# Altium PCB science_board_pcb.PcbDoc
Units mil, origin at the board's own origin, x right, y up, seen from the top; angles counter-clockwise.
Board outline 3965 x 3149.61 mil, 2 copper layers (Top Layer, GND); 127 components, 64 nets, 371 pads, 90 vias.
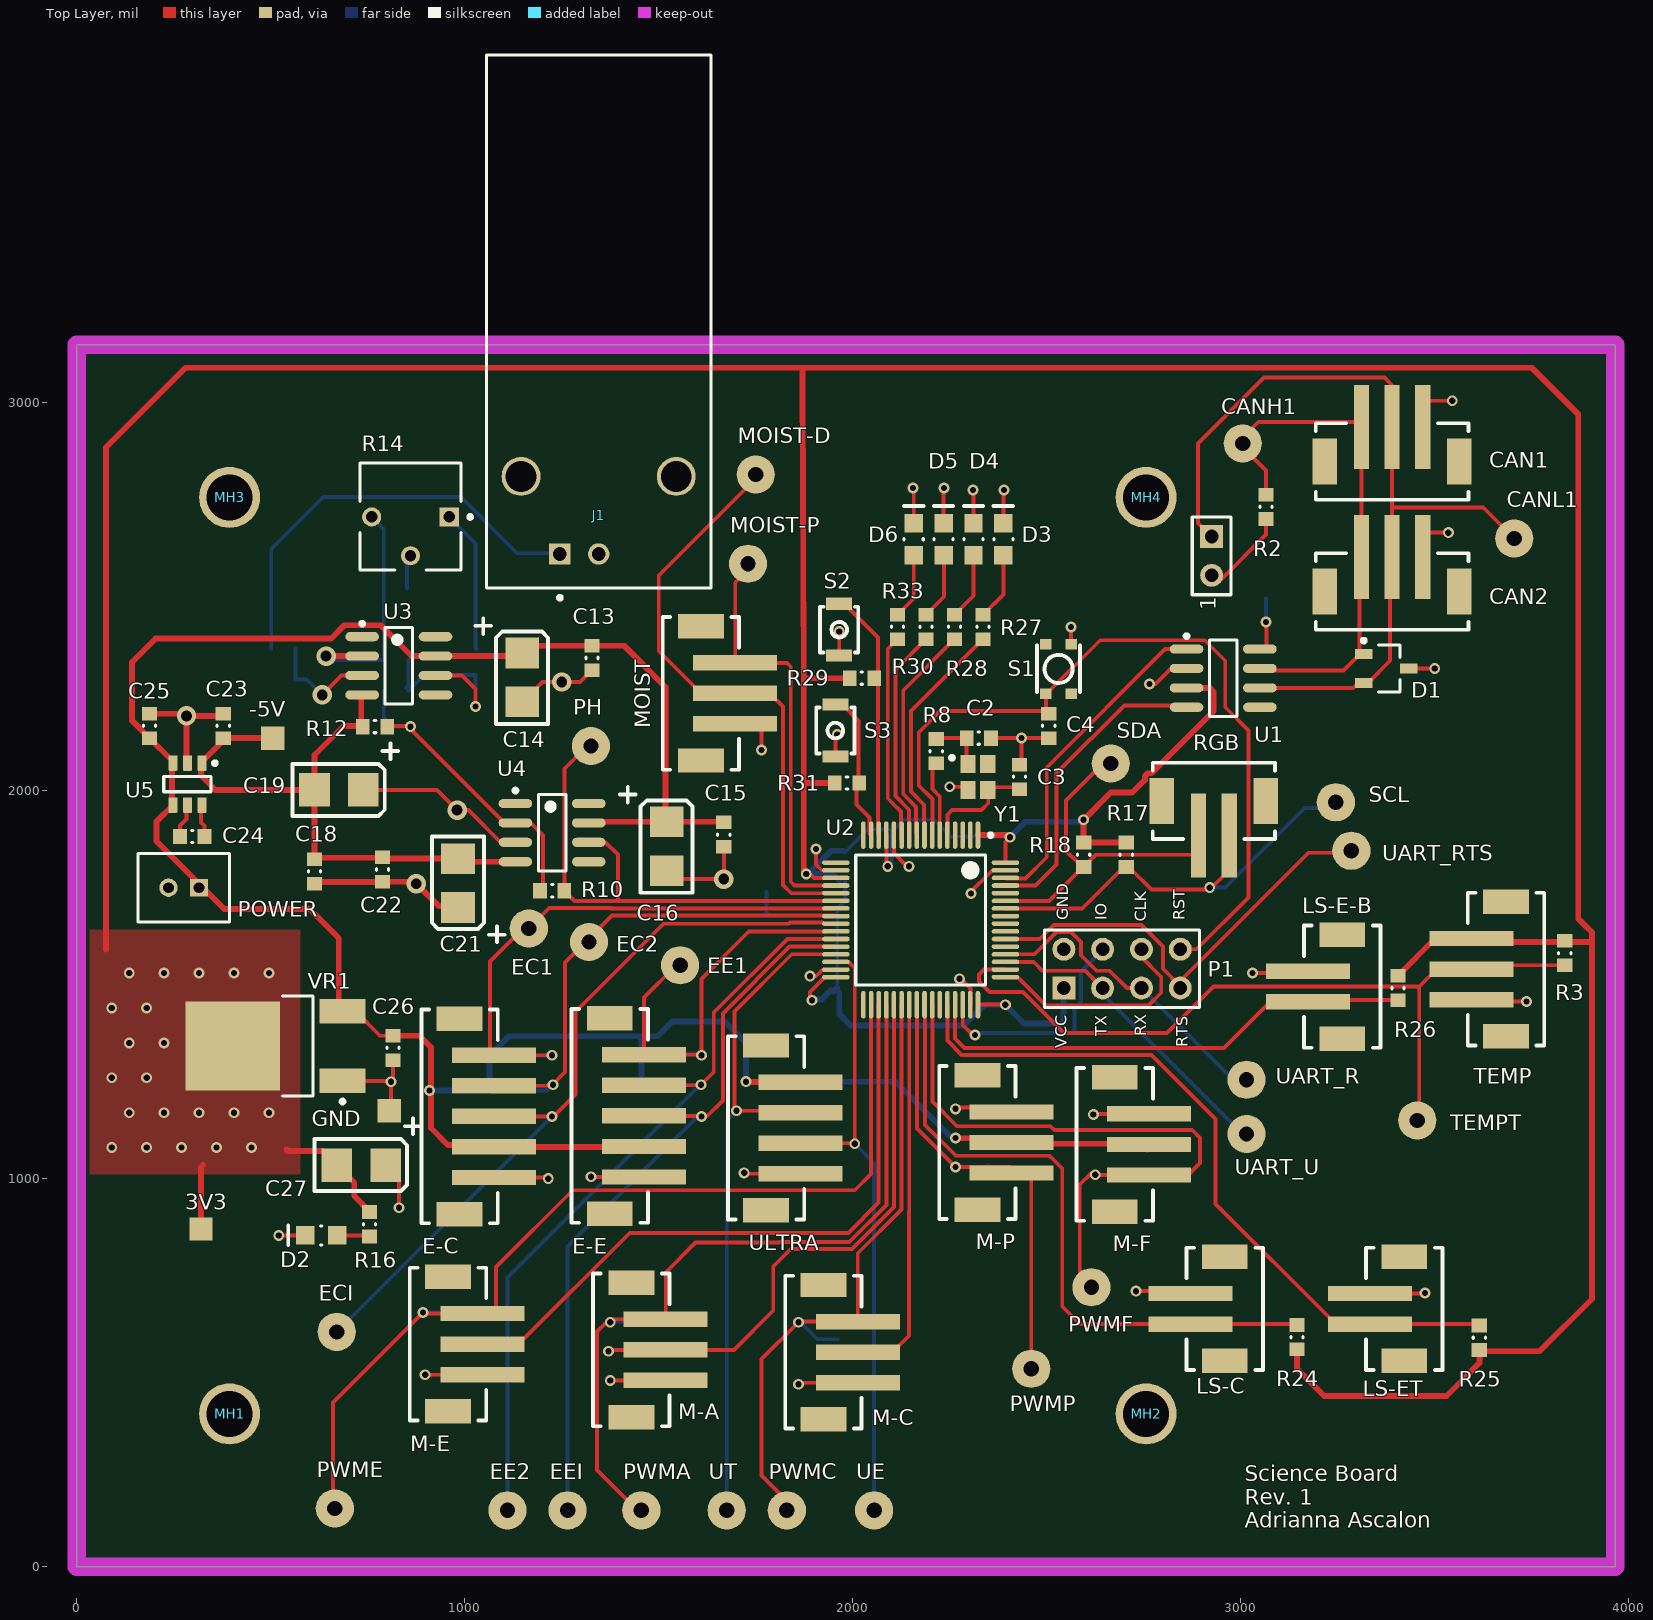
[diagram p0: Top Layer view]
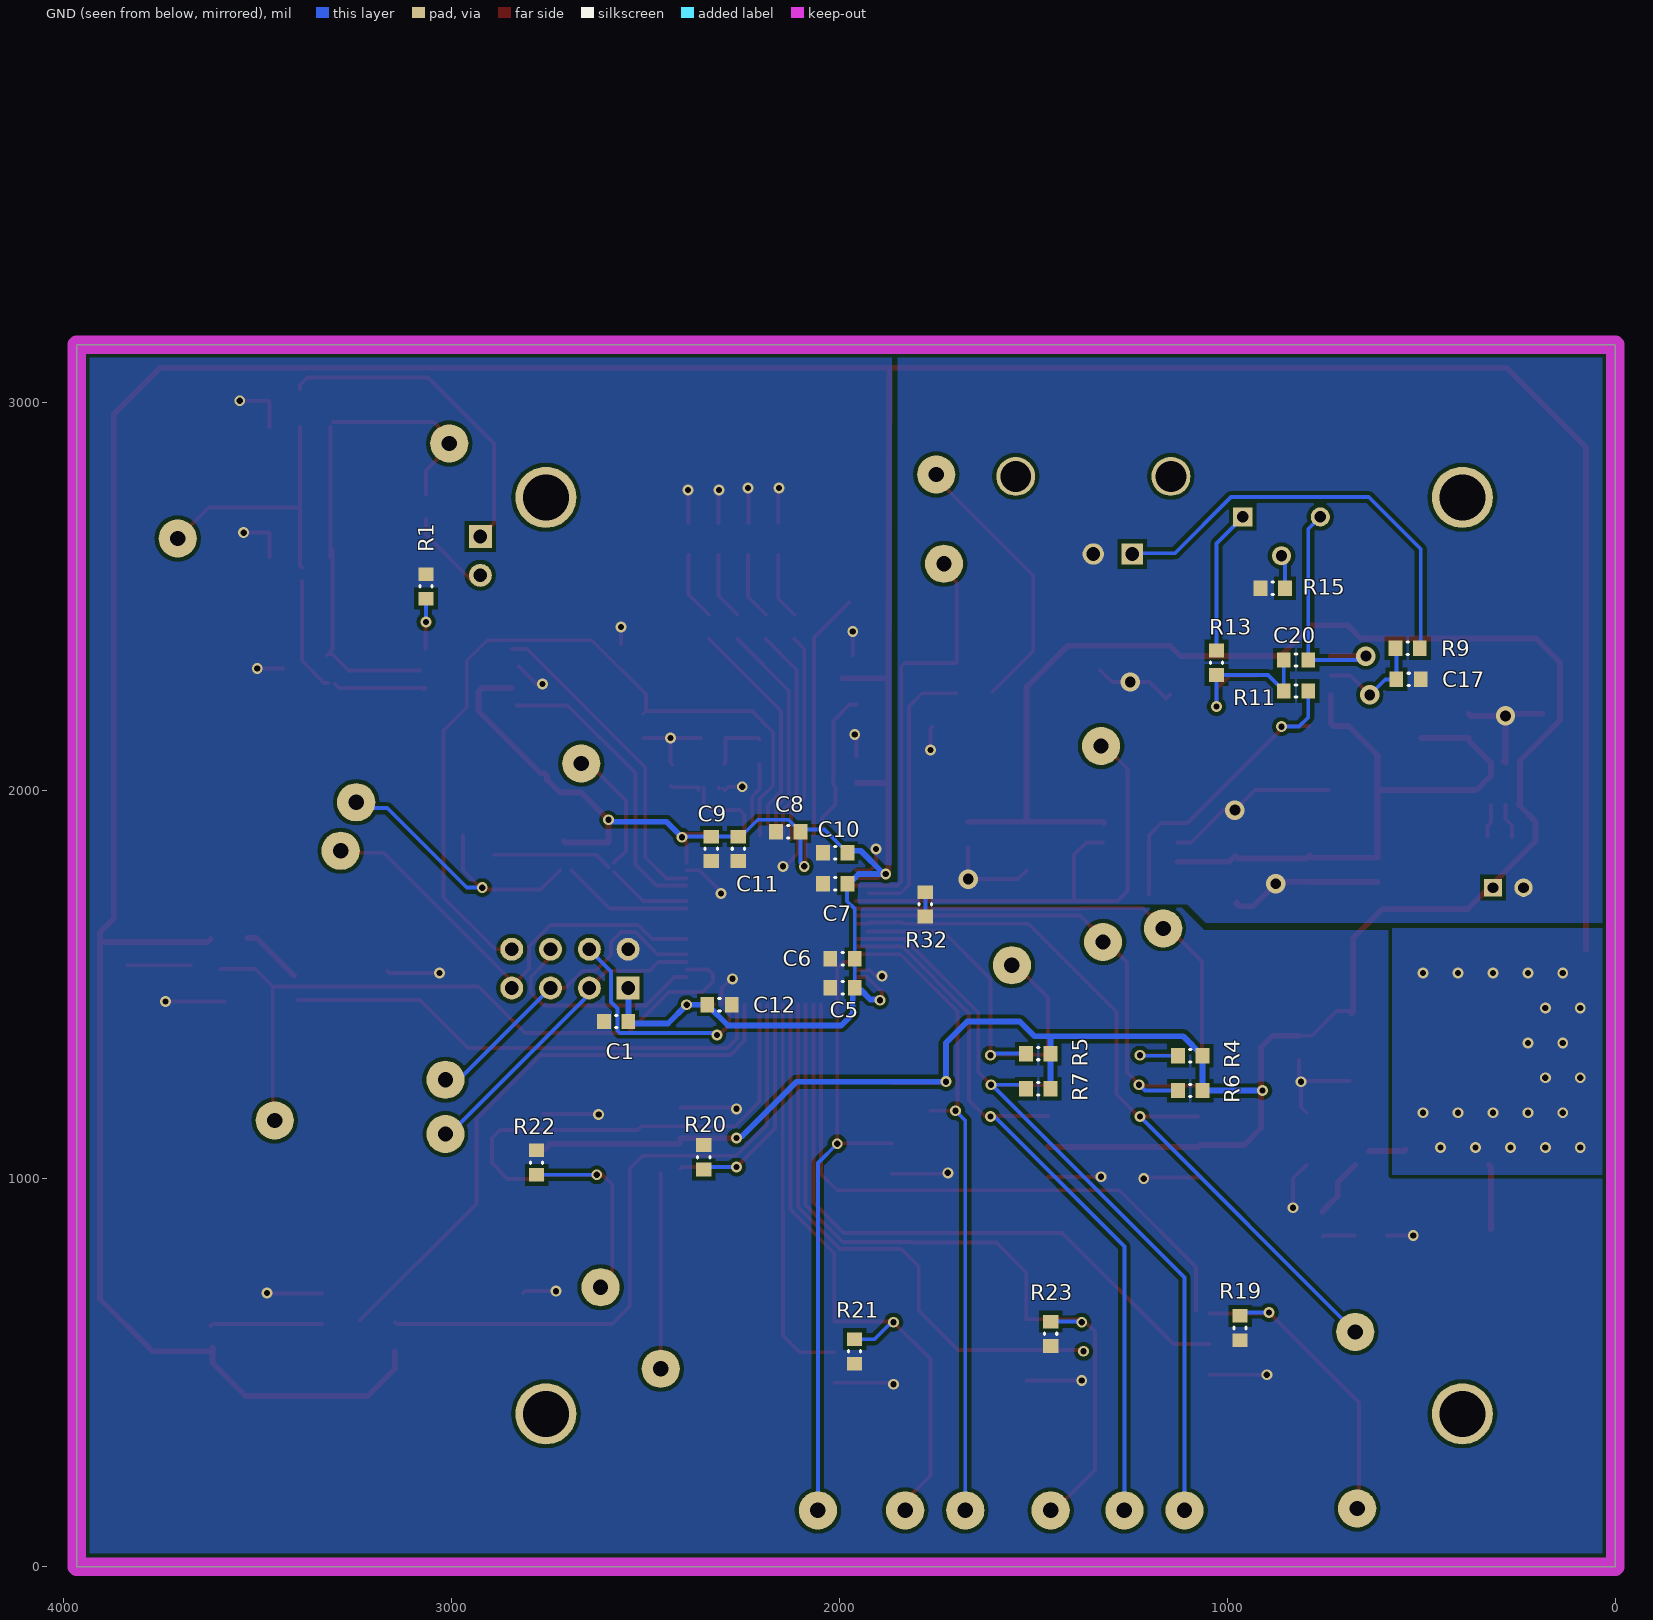
[diagram p1: GND view, seen from below]

## Layer stack, top to bottom
Top Solder: solder mask 0.4, Solder Resist, Dk 3.5
Top Layer: signal copper 1.4
Dielectric 1: dielectric 12.6, FR-4, Dk 4.8
GND: signal copper 1.4
Bottom Solder: solder mask 0.4, Solder Resist, Dk 3.5

## Board outline
0,0 3965,0 3965,3149.61 0,3149.61

## Design rules (kind name [scope] priority, off if disabled: settings)
BoardOutlineClearance [All] p1: gap=10 ignorepadtopadclearanceinfootprint=FALSE except(0: Arc-SplitContinuation Track-SplitContinuation SMDPad-SplitContinuation THPad-SplitContinuation Via-SplitContinuation Fill-SplitContinuation Poly-SplitContinuation Region-SplitContinuation Text-SplitContinuation)
Clearance [All] p1: gap=10 ignorepadtopadclearanceinfootprint=TRUE except(0: Arc-Hole Track-Hole SMDPad-Hole THPad-Hole Via-Hole Fill-Hole Poly-Hole Region-Hole Text-Hole; 5: Arc-SMDPad Track-SMDPad SMDPad-SMDPad; 8: Arc-Arc Arc-Track Track-Track)
HoleSize [All] p1: absolutevalues=TRUE maxlimit=150 minlimit=1 maxpercent=80.000 minpercent=20.000
PolygonConnect [All] p1: connectstyle=Direct reliefconductorwidth=10 reliefentries=4 polygonreliefangle="90 Angle" airgapwidth=10
RoutingVias [All] p1: holewidth=16 width=28 viastyle="Through Hole" minholewidth=16 minwidth=28 maxholewidth=28 maxwidth=50
SolderMaskExpansion [All] p1: expansion=4
Width thicc [(InNet('-5V') OR InNet('+3V3') OR InNet('+5V'))] p1: maxlimit=20 minlimit=10 preferedwidth=15 minimp=50.000000 maximp=50.000000 favimp=50.000000
Width [All] p2: maxlimit=20 minlimit=8 preferedwidth=10 bottomlayer_minwidth=10 bottomlayer_maxwidth=10 minimp=50.000000 maximp=50.000000 favimp=50.000000
29 further rules are at their usual default settings.

## Classes and differential pairs
component class support: -5V D3 D4 D5 D6 EC1 EC2 ECI EE1 EE2 EEI MH1 MH2 MH3 MH4 MOIST-D MOIST-P PH PWMA PWMC PWME PWMF PWMP R17 R18 R19 R20 R21 R22 R23 R24 R25 R26 R27 R28 R29 R30 R31 R32 R33 S2 S3 SCL SDA TEMPT UART_R UART_RTS UART_U UE UT
component class power: 3V3 C26 C27 D2 GND R16 VR1
component class ph: C13 C14 C15 C16 C17 C18 C19 C20 C21 C22 C23 C24 C25 J1 R9 R10 R11 R12 R13 R14 R15 U3 U4 U5
component class mcu: C2 C3 C4 C5 C6 C7 C8 C9 C10 C11 C12 R8 S1 U2 Y1
component class connectors: CAN1 CAN2 E-C E-E LS-C LS-E-B LS-ET M-A M-C M-E M-F M-P MOIST P1 POWER R3 R4 R5 R6 R7 RGB TEMP ULTRA
component class can: 1 C1 CANH1 CANL1 D1 R1 R2 U1

## Components (designator, comment, footprint, x,y, rotation, side; value= is the part's Value field where it differs from the comment)
1 "Header 2" HDR1X2 2925,2655 r270 top
3V3 "TESTPOINT_SMD" TESTPOINT 320,870 r90 top
-5V "TESTPOINT_SMD" TESTPOINT 505,2135 r90 top
C1 "CAP_0.1uF_16V_0603" CAPC0603(1608)55_N 2575,1405 r180 bottom value=0.1uF
C2 "CAP_15pF_0603" CAPC0603(1608)55_N 2325,2135.42 r180 top locked value=15pF
C3 "CAP_15pF_0603" CAPC0603(1608)55_N 2429.73,2035.38 r270 top locked value=15pF
C4 "CAP_0.1uF_16V_0603" CAPC0603(1608)55_N 2505,2166.91 r90 top locked value=0.1uF
C5 "CAP_0.1uF_16V_0603" CAPC0603(1608)55_N 1991.3,1491.91 r0 bottom value=0.1uF
C6 "CAP_0.1uF_16V_0603" CAPC0603(1608)55_N 1991.3,1566.91 r0 bottom value=0.1uF
C7 "CAP_0.1uF_16V_0603" CAPC0603(1608)55_N 2010,1760.14 r0 bottom value=0.1uF
C8 "CAP_4.7uF_0603" CAPC0603(1608)55_N 2131.31,1894.32 r180 bottom value=4.7uF
C9 "CAP_0.1uF_16V_0603" CAPC0603(1608)55_N 2330,1850 r270 bottom value=0.1uF
C10 "CAP_4.7uF_0603" CAPC0603(1608)55_N 2010,1840.14 r180 bottom value=4.7uF
C11 "CAP_10nF_0603" CAPC0603(1608)55_N 2260,1850 r90 bottom value=10nF
C12 "CAP_1uF_16V_0603" CAPC0603(1608)55_N 2308.5,1448.41 r0 bottom value=1uF
C13 "CAP_0.1uF_50V_0603" CAPC0603(1608)55_N 1327.56,2341.91 r90 top value=0.1uF
C14 "CAP_10uF_0603_POL" AVX-CAPC3528_V 1147.56,2291.91 r270 top value=10uF
C15 "CAP_0.1uF_50V_0603" CAPC0603(1608)55_N 1667.56,1886.91 r90 top value=0.1uF
C16 "CAP_10uF_0603_POL" AVX-CAPC3528_V 1520,1856.91 r270 top value=10uF
C17 "CAP_2.2nF_0603" CAPC0603(1608)55_N 532.56,2286.91 r0 bottom value=2.2nF
C18 "CAP_0.1uF_50V_0603" CAPC0603(1608)55_N 612.56,1791.91 r90 top value=0.1uF
C19 "CAP_10uF_0603_POL" AVX-CAPC3528_V 675.56,2001.91 r180 top value=10uF
C20 "CAP_1uF_16V_0603" CAPC0603(1608)55_N 822.56,2336.91 r0 bottom value=1uF
C21 "CAP_10uF_0603_POL" AVX-CAPC3528_V 982.56,1761.91 r90 top value=10uF
C22 "CAP_0.1uF_50V_0603" CAPC0603(1608)55_N 787.56,1796.91 r90 top value=0.1uF
C23 "CAP_1uF_16V_0603" CAPC0603(1608)55_N 377.56,2166.91 r90 top value=1uF
C24 "CAP_1uF_16V_0603" CAPC0603(1608)55_N 297.56,1881.91 r0 top value=1uF
C25 "CAP_1uF_16V_0603" CAPC0603(1608)55_N 187.56,2166.91 r270 top value=1uF
C26 "CAP_0.33uF_16V_0603" CAPC0603(1608)55_N 815,1336.91 r90 top value=0.33uF
C27 "10uF" AVX-CAPC3528_V 732.99,1035 r180 top
CAN1 "PH TOP SMD" JST-B3B-SM4-TB 3390,2750 r0 top
CAN2 "PH TOP SMD" JST-B3B-SM4-TB 3390,2415 r0 top locked
CANH1 "TESTPOINT_LOOP" TESTPOINT_LOOP 3005,2895 r0 top
CANL1 "TESTPOINT_LOOP" TESTPOINT_LOOP 3705,2650 r90 top
D1 "TVS_DIODE_CAN" TVS_DIODE_CAN 3375,2315 r0 top
D2 "DIO_LED_R" LED_0805_LINE 630,853.85 r180 top
D3 "DIO_LED_Y" LED_0805_LINE 2388.01,2648.32 r90 top
D4 "DIO_LED_G" LED_0805_LINE 2311.02,2648.32 r90 top
D5 "DIO_LED_G" LED_0805_LINE 2234.03,2648.32 r90 top
D6 "DIO_LED_G" LED_0805_LINE 2157.05,2648.32 r90 top
E-C "PH TOP SMD" JST-B5B-SM4-TB 887.99,1160.65 r270 top
E-E "PH TOP SMD" JST-B5B-SM4-TB 1275,1161.88 r270 top
EC1 "TESTPOINT_LOOP" TESTPOINT_LOOP 1165,1645 r0 top
EC2 "TESTPOINT_LOOP" TESTPOINT_LOOP 1320,1610 r0 top
ECI "TESTPOINT_LOOP" TESTPOINT_LOOP 670,605 r0 top
EE1 "TESTPOINT_LOOP" TESTPOINT_LOOP 1555,1550 r90 top
EE2 "TESTPOINT_LOOP" TESTPOINT_LOOP 1110,145 r90 top
EEI "TESTPOINT_LOOP" TESTPOINT_LOOP 1265,145 r90 top
GND "TESTPOINT_SMD" TESTPOINT 805,1175 r90 top
J1 "CON_BNC" 1-1337543-0 1345,2810 r0 top
LS-C "PH TOP SMD" JST-B2B-SM4-TB 3057.01,664.37 r90 top locked
LS-E-B "PH TOP SMD" JST-B2B-SM4-TB 3360,1495 r90 top
LS-ET "PH TOP SMD" JST-B2B-SM4-TB 3520,664.37 r90 top locked
M-A "PH TOP SMD" JST-B3B-SM4-TB 1330.81,558.82 r270 top
M-C "PH TOP SMD" JST-B3B-SM4-TB 1825.81,552.66 r270 top
M-E "PH TOP SMD" JST-B3B-SM4-TB 858.29,573.43 r270 top
M-F "PH TOP SMD" JST-B3B-SM4-TB 2576.57,1088.23 r270 top locked
M-P "PH TOP SMD" JST-B3B-SM4-TB 2222.68,1093.23 r270 top
MH1 "MOUNTING_HOLES" MOUNTING_HOLE#1 225,314.96 r0 top
MH2 "MOUNTING_HOLES" MOUNTING_HOLE#2 4803.15,196.85 r0 top
MH3 "MOUNTING_HOLES" MOUNTING_HOLE#3 4173.23,433.07 r0 top
MH4 "MOUNTING_HOLES" MOUNTING_HOLE#4 4384.81,220.94 r0 top
MOIST "PH TOP SMD" JST-B3B-SM4-TB 1510,2251.01 r270 top
MOIST-D "TESTPOINT_LOOP" TESTPOINT_LOOP 1750,2815 r90 top
MOIST-P "TESTPOINT_LOOP" TESTPOINT_LOOP 1730,2585 r90 top
P1 "HEADER 4X2" HEADER_2X4 2543.94,1491.19 r0 top locked
PH "TESTPOINT_LOOP" TESTPOINT_LOOP 1325,2115 r90 top
POWER "PH TOP TH" JST-B2B-PHSK 275.63,1750 r180 top
PWMA "TESTPOINT_LOOP" TESTPOINT_LOOP 1455,145 r90 top
PWMC "TESTPOINT_LOOP" TESTPOINT_LOOP 1830,145 r90 top
PWME "TESTPOINT_LOOP" TESTPOINT_LOOP 665,150 r90 top
PWMF "TESTPOINT_LOOP" TESTPOINT_LOOP 2615,720 r90 top
PWMP "TESTPOINT_LOOP" TESTPOINT_LOOP 2460,510 r90 top
R1 "RES_0R_0603" RESC0603(1608)_N 3065,2526.5 r90 bottom value=0R
R2 "RES_120R_0603" RESC0603(1608)_N 3065,2731.5 r270 top value=120R
R3 "RES_4K7_0603" RESC0603(1608)_N 3835,1581.5 r90 top value=4K7
R4 "RES_10K_0603" RESC0603(1608)_N 1095,1316.91 r180 bottom value=10K
R5 "RES_10K_0603" RESC0603(1608)_N 1486.85,1322.23 r180 bottom value=10K
R6 "RES_10K_0603" RESC0603(1608)_N 1095,1226.95 r180 bottom value=10K
R7 "RES_10K_0603" RESC0603(1608)_N 1486.85,1231.91 r180 bottom value=10K
R8 "RES_0R_0603" RESC0603(1608)_N 2215,2101.91 r90 top value=0R
R9 "RES_4M7_0603" RESC0603(1608)_N 535,2366.91 r0 bottom value=4.7M
R10 "RES_30K_0603" RESC0603(1608)_N 1225,1741.91 r0 top value=30K
R11 "RES_30K_0603" RESC0603(1608)_N 822.56,2256.91 r180 bottom value=30K
R12 "RES_75K_0603" RESC0603(1608)_N 768.5,2165 r0 top value=75K
R13 "RES_2K2_0603" RESC0603(1608)_N 1027.56,2329.51 r270 bottom value=2K2
R14 "POT_5K" 3362P-1-502LF 860,2706.91 r180 top value=5K
R15 "RES_1K_0603" RESC0603(1608)_N 882.56,2521.91 r180 bottom value=1K
R16 "RES_100R_0603" RESC0603(1608)_N 754.06,882.39 r90 top value=100R
R17 "RES_4K7_0603" RESC0603(1608)_N 2705,1835 r90 top value=4K7
R18 "RES_4K7_0603" RESC0603(1608)_N 2595,1835 r90 top value=4K7
R19 "RES_10K_0603" RESC0603(1608)_N 966.91,615 r90 bottom value=10K
R20 "RES_10K_0603" RESC0603(1608)_N 2349.21,1055 r270 bottom value=10K
R21 "RES_10K_0603" RESC0603(1608)_N 1960.49,554.63 r90 bottom value=10K
R22 "RES_10K_0603" RESC0603(1608)_N 2780,1041.5 r270 bottom value=10K
R23 "RES_10K_0603" RESC0603(1608)_N 1455,600 r90 bottom value=10K
R24 "RES_10K_0603" RESC0603(1608)_N 3145,591.5 r270 top value=10K
R25 "RES_10K_0603" RESC0603(1608)_N 3615,590 r270 top value=10K
R26 "RES_10K_0603" RESC0603(1608)_N 3405,1491.5 r90 top value=10K
R27 "RES_100R_0603" RESC0603(1608)_N 2335.47,2422.03 r90 top value=100R
R28 "RES_100R_0603" RESC0603(1608)_N 2262.14,2422.03 r90 top value=100R
R29 "RES_10K_0603" RESC0603(1608)_N 2023.5,2290 r180 top value=10K
R30 "RES_100R_0603" RESC0603(1608)_N 2188.81,2422.03 r90 top value=100R
R31 "RES_10K_0603" RESC0603(1608)_N 1985,2020 r0 top value=10K
R32 "RES_0R_0603" RESC0603(1608)_N 1778.03,1706.91 r90 bottom value=0R
R33 "RES_100R_0603" RESC0603(1608)_N 2115.47,2422.03 r90 top value=100R
RGB "PH TOP SMD" JST-B2B-SM4-TB 2930.63,2072.01 r180 top
S1 "SW_PWR" PTS830GM140 2530.35,2313.77 r270 top
S2 "SW_TACTILE" B3U-1100P 1965,2415 r270 top
S3 "SW_TACTILE" B3U-1100P 1955,2155 r270 top
SCL "TESTPOINT_LOOP" TESTPOINT_LOOP 3245,1970 r0 top
SDA "TESTPOINT_LOOP" TESTPOINT_LOOP 2665,2070 r0 top
TEMP "PH TOP SMD" JST-B3B-SM4-TB 3782.01,1540 r90 top
TEMPT "TESTPOINT_LOOP" TESTPOINT_LOOP 3455,1150 r90 top
U1 "IC TXRX CAN" LT-S8_N 2954.74,2290 r0 top
U2 "STM32F091RC" STM_LQFP64_N 2175,1666.91 r270 top locked
U3 "CA3140AMZ" CA3140AMZ 830,2321.91 r0 top
U4 "TL081BCDG4" TL081BCDG4 1225,1891.91 r0 top
U5 "LM2776" SOT23-6 285,2016.91 r270 top
UART_R "TESTPOINT_LOOP" TESTPOINT_LOOP 3015,1255 r90 top
UART_RTS "TESTPOINT_LOOP" TESTPOINT_LOOP 3285,1845 r90 top
UART_U "TESTPOINT_LOOP" TESTPOINT_LOOP 3015,1115 r90 top
UE "TESTPOINT_LOOP" TESTPOINT_LOOP 2055,145 r90 top
ULTRA "PH TOP SMD" JST-B4B-SM4-TB 1677.99,1130.63 r270 top locked
UT "TESTPOINT_LOOP" TESTPOINT_LOOP 1675,145 r90 top
VR1 "5V0_3V3_LDO" VOLTAGE_REGULATOR 575,1341.91 r90 top
Y1 "CRYSTAL_32MHZ" AVX-CX2520DB32000D0GEJZ1-4_V 2322.53,2035.38 r0 top locked

## Footprints (in the part's own frame and the unit in brackets; to place one, negate y for a bottom-side part, rotate by r counter-clockwise, add the part's x,y. Pads: shape width x height; smd on the part's side, far side on the other; paste and mask are expansions set on the pad)
1-1337543-0 [mm]
  rect 1.4x1.4 hole 0.89: 1(-2.54,-5.08)
  round 1.4 hole 0.89: 2(0,-5.08)
  round 2.55 hole 2.01: MH1(-5.08,0) MH2(5.08,0)
  silkscreen extent -7.35,-8.07 7.35,27.6, body extent -7.35,-7.1 7.35,28.05, height 15.8
3362P-1-502LF [mm]
  rect 1.25x1.25 hole 0.75: 1(-2.54,0.035)
  round 1.25 hole 0.75: 2(0,2.575) 3(2.54,0.035)
  silkscreen extent -4.03,-3.49 3.3,3.49, body extent -3.3,-3.49 3.3,3.49, height 4.95
AVX-CAPC3528_V [mm] "SMT Capacitor, 2 Leads, Body 3.5x2.8mm"
  rect 2x2.2 smd: 1(-1.6,0) 2(1.6,0)
  silkscreen extent -3.87,-3.05 3.05,1.7, body extent -1.79,-1.54 1.8,1.54, height 1.9
AVX-CX2520DB32000D0GEJZ1-4_V [mm] "Hand Drawn, 4-Leads,Body 2.5x2mm"
  rect 1x1.2 smd: 1(-0.65,0.85) 2(-0.65,-0.85) 3(0.65,-0.85) 4(0.65,0.85)
  silkscreen extent -1.82,1.13 -1.58,1.38, body extent -1,-1.25 1,1.25, height 0.55
B3U-1100P [mm] "TACTILE SWITCH GREY"
  rect 0.8x1.7 smd: 1(-1.7,0) 2(1.7,0)
  silkscreen extent -1.5,-1.25 1.5,1.25
CA3140AMZ [mm]
  oval 2.2x0.6 smd: 1(-2.4,1.905) 2(-2.4,0.635) 3(-2.4,-0.635) 4(-2.4,-1.905) 5(2.4,-1.905) 6(2.4,-0.635) 7(2.4,0.635) 8(2.4,1.905)
  silkscreen extent -2.52,-2.5 0.9,2.88, body extent -2,-2.5 2,2.5, height 1.75
CAPC0603(1608)55_N [mm] "Chip Capacitor, Body 1.6x0.8mm, Height 0.55mm, IPC Medium Density"
  rect 0.9x1 smd: 1(-0.8,0) 2(0.8,0)
  silkscreen extent -0.05,-0.4 0.05,0.4, body extent -0.87,-0.48 0.88,0.47, height 0.55
HDR1X2 [mm] "Connector; Header; 2 Position"
  rect 1.5x1.5 hole 0.9: 1(0,0)
  round 1.5 hole 0.9: 2(2.54,0)
  silkscreen extent -1.27,-1.27 3.81,1.27
HEADER_2X4 [mm]
  rect 1.5x1.5 hole 0.9: 1(0,0)
  round 1.5 hole 0.9: 2(2.54,0) 3(5.08,0) 4(7.62,0) 5(0,2.54) 6(2.54,2.54) 7(5.08,2.54) 8(7.62,2.54)
  silkscreen extent -1.27,-1.27 8.89,3.81
JST-B2B-PHSK [mm]
  rect 1.162x1.162 / inner rect 1.524x1.524 / far side rect 1.162x1.162 hole 0.7: 1(-1,0)
  round 1.2 / inner round 1.524 / far side round 1.2 hole 0.7: 2(1,0)
  silkscreen extent -3,-2.25 3,2.25
JST-B2B-SM4-TB [mm]
  rect 1x5.5 smd: 1(-1,4.75) 2(1,4.75)
  rect 1.6x3 smd: 3(-3.4,2.5) 4(3.4,2.5)
  silkscreen extent -4,0 4,5
JST-B3B-SM4-TB [mm]
  rect 1x5.5 smd: 1(-2,4.75) 2(0,4.75) 3(2,4.75)
  rect 1.6x3 smd: 4(-4.4,2.5) 5(4.4,2.5)
  silkscreen extent -5,0 5,5
JST-B4B-SM4-TB [mm]
  rect 1x5.5 smd: 1(-3,4.75) 2(-1,4.75) 3(1,4.75) 4(3,4.75)
  rect 1.6x3 smd: 5(-5.4,2.5) 6(5.4,2.5)
  silkscreen extent -6,0 6,5
JST-B5B-SM4-TB [mm]
  rect 1x5.5 smd: 1(-4,4.75) 2(-2,4.75) 3(0,4.75) 4(2,4.75) 5(4,4.75)
  rect 1.6x3 smd: 6(-6.4,2.5) 7(6.4,2.5)
  silkscreen extent -7,0 7,5
LED_0805_LINE [mm] "SMD, 2-Leads, Body 2x1.25mm"
  rect 1.2x1.2 smd: 1(-1.05,0) 2(1.05,0)
  silkscreen extent -0.05,-0.63 2.16,0.64, body extent -1,-0.63 1,0.63, height 0.8
LT-S8_N [mm] "SOP, 8-Leads, Body 4.9x3.9mm, Pitch 1.27mm, IPC Medium Density"
  oval 2.2x0.6 smd: 1(-2.4,1.905) 2(-2.4,0.635) 3(-2.4,-0.635) 4(-2.4,-1.905) 5(2.4,-1.905) 6(2.4,-0.635) 7(2.4,0.635) 8(2.4,1.905)
  silkscreen extent -2.52,-2.5 0.9,2.88, body extent -2,-2.5 2,2.5, height 1.76
MOUNTING_HOLE#1 [mm]
  round 4 hole 3 unplated: 0(4.285,2)
MOUNTING_HOLE#2 [mm]
  round 4 hole 3 unplated: 0(-52,5)
MOUNTING_HOLE#3 [mm]
  round 4 hole 3 unplated: 0(-96,59)
MOUNTING_HOLE#4 [mm]
  round 4 hole 3 unplated: 0(-41.374,64.388)
PTS830GM140 [mm] "PWR TACTILE SWITCH (RED)"
  rect 0.7x0.75 smd: 1(-1.625,0.825) 2(1.625,0.825) 3(-1.625,-0.825) 4(1.625,-0.825)
  silkscreen extent -1.53,-1.4 1.52,1.4
RESC0603(1608)_N [mm] "Chip Resistor, Body 1.6x0.8mm, IPC Medium Density"
  rect 0.9x1 smd: 1(-0.8,0) 2(0.8,0)
  silkscreen extent -0.05,-0.4 0.05,0.4, body extent -0.85,-0.47 0.85,0.47, height 0.6
SOT23-6 [mm] "SOT23, 6-Leads, Body 3.05x1.75mm, Pitch 0.95mm, IPC Medium Density"
  rrect17% 1x0.6 smd: 1(-1.375,0.95) 2(-1.375,0) 3(-1.375,-0.95) 4(1.375,-0.95) 5(1.375,0) 6(1.375,0.95)
  silkscreen extent -1.5,-1.55 0.5,1.93, body extent -1.43,-1.48 1.43,1.49, height 0.9
STM_LQFP64_N [mm] "Thin QFP, 64-Leads, Body 10x10mm, Pitch 0.5mm, IPC Medium Density"
  oval 1.8x0.3 smd mask+0.05: 1(-5.55,3.75) 2(-5.55,3.25) 3(-5.55,2.75) 4(-5.55,2.25) 5(-5.55,1.75) 6(-5.55,1.25) 7(-5.55,0.75) 8(-5.55,0.25) 9(-5.55,-0.25) 10(-5.55,-0.75) 11(-5.55,-1.25) 12(-5.55,-1.75) 13(-5.55,-2.25) 14(-5.55,-2.75) 15(-5.55,-3.25) 16(-5.55,-3.75) 33(5.55,-3.75) 34(5.55,-3.25) 35(5.55,-2.75) 36(5.55,-2.25) 37(5.55,-1.75) 38(5.55,-1.25) 39(5.55,-0.75) 40(5.55,-0.25) 41(5.55,0.25) 42(5.55,0.75) 43(5.55,1.25) 44(5.55,1.75) 45(5.55,2.25) 46(5.55,2.75) 47(5.55,3.25) 48(5.55,3.75)
  oval 0.3x1.8 smd mask+0.05: 17(-3.75,-5.55) 18(-3.25,-5.55) 19(-2.75,-5.55) 20(-2.25,-5.55) 21(-1.75,-5.55) 22(-1.25,-5.55) 23(-0.75,-5.55) 24(-0.25,-5.55) 25(0.25,-5.55) 26(0.75,-5.55) 27(1.25,-5.55) 28(1.75,-5.55) 29(2.25,-5.55) 30(2.75,-5.55) 31(3.25,-5.55) 32(3.75,-5.55) 49(3.75,5.55) 50(3.25,5.55) 51(2.75,5.55) 52(2.25,5.55) 53(1.75,5.55) 54(1.25,5.55) 55(0.75,5.55) 56(0.25,5.55) 57(-0.25,5.55) 58(-0.75,5.55) 59(-1.25,5.55) 60(-1.75,5.55) 61(-2.25,5.55) 62(-2.75,5.55) 63(-3.25,5.55) 64(-3.75,5.55)
  silkscreen extent -5.67,-4.25 4.25,4.7, body extent -5,-5 5,5, height 1.6
TESTPOINT [mil]
  rect 60x60 smd: 1(0,0)
TESTPOINT_LOOP [mm]
  round 2.5 hole 1: 1(0,0)
TL081BCDG4 [mm]
  oval 2.2x0.6 smd: 1(-2.4,1.905) 2(-2.4,0.635) 3(-2.4,-0.635) 4(-2.4,-1.905) 5(2.4,-1.905) 6(2.4,-0.635) 7(2.4,0.635) 8(2.4,1.905)
  silkscreen extent -2.52,-2.5 0.9,2.88, body extent -2,-2.5 2,2.5, height 1.75
TVS_DIODE_CAN [mm] "SOT23, 3-Leads, Body 2.95x2.80mm, Pitch 0.95mm, IPC Low Density"
  rect 1.15x0.65 smd: 1(-1.475,0.95) 2(-1.475,-0.95) 3(1.475,0)
  silkscreen extent -1.6,-1.55 0.9,1.95, body extent -1.5,-1.55 1.5,1.55, height 1.25
VOLTAGE_REGULATOR [mm] "DPAK, 3-Leads, Body 6.095x6.54mm, Pitch 4.57mm"
  rect 1.6x3 smd: 1(-2.285,-2.79) 3(2.285,-2.79)
  rect 5.8x6.2 smd: 2(0,4.39)
  silkscreen extent -3.76,-2.92 3.27,1.14, body extent -3.27,-0.84 3.27,5.25, height 2.38

## Part data
1: "Header, 2-Pin", LatestRevisionDate=17-Jul-2002, LatestRevisionNote="Re-released for DXP Platform.", Publisher="Altium Limited"
C1 C4 C5 C6 C7 C9: "CAP CER 0.1UF 16V X7R 0603", Digikey Part Number=311-1088-1-ND, Manufacturer=Yageo, MPN=CC0603KRX7R7BB104, Package="0603 (1608 Metric)", Temperature Coefficient=X7R, Voltage Rating=16V, Dimensions="0.063\" L x 0.031\" W (1.60mm x 0.80mm)"
C2 C3: "CAP CER 15PF 250V NPO 0603", Digikey Part Number=311-3282-1-ND, Manufacturer=Yageo, MPN=AC0603JRNPOYBN150, Package="0603 (1608 Metric)", Temperature Coefficient=NP0, Voltage Rating=250v, Dimensions="0.063\" L x 0.031\" W (1.60mm x 0.80mm)"
C8 C10: "CAP CER 4.7UF 6.3V X5R 0603", Digikey Part Number=311-1521-1-ND, Manufacturer=Yageo, MPN=CC0603KRX5R5BB475, Package="0603 (1608 Metric)", Temperature Coefficient=X5R, Voltage Rating=6.3V, Dimensions="0.063\" L x 0.031\" W (1.60mm x 0.80mm)"
C11: "CAP CER 10000PF 16V X7R 0603", Digikey Part Number=311-3369-1-ND, Manufacturer=Yageo, MPN=CC0603KRX7R7BB103, Package="0603 (1608 Metric)", Temperature Coefficient=X7R, Voltage Rating=16V, Dimensions="0.063\" L x 0.031\" W (1.60mm x 0.80mm)"
C12 C20 C23 C24 C25: "CAP CER 1UF 16V Y5V 0603", Digikey Part Number=311-1372-1-ND, Manufacturer=Yageo, MPN=CC0603ZRY5V7BB105, Package="0603 (1608 Metric)", Temperature Coefficient=Y5V, Voltage Rating=16V, Dimensions="0.063\" L x 0.031\" W (1.60mm x 0.80mm)"
C13 C15 C18 C22: "CAP CER 0.1UF 50V X7R 0603", Digikey Part Number=311-1344-1-ND, Manufacturer=Yageo, MPN=CC0603KRX7R9BB104, Package="0603 (1608 Metric)", Temperature Coefficient=X7R, Voltage Rating=50V, Dimensions="0.063\" L x 0.031\" W (1.60mm x 0.80mm)"
C14 C16 C19 C21: "Capacitor, Tantalum, 10uF 10% 20V MCCT-B (3528)", Manufacturer=Yageo, Package="0603 (1608 Metric)", Part Number=CC0603MRX5R6BB106, Temperature Coefficient=X5R, Voltage Rating=10V, Dimensions="0.063\" L x 0.031\" W (1.60mm x 0.80mm)"
C17: "CAP CER 2.2NF 25V X7R 0603", Digikey Part Number=311-3653-1-ND, Manufacturer=Yageo, MPN=CC0603KRX7R8BB222, Package="0603 (1608 Metric)", Temperature Coefficient=X7R, Voltage Rating=25V, Dimensions="0.063\" L x 0.031\" W (1.60mm x 0.80mm)"
C26: "CAP CER 0.33UF 16V X7R 0603", Digikey Part Number=490-6050-1-ND, Manufacturer="Murata Electronics North America", MPN=GCM188R71C334KA37D, Package="0603 (1608 Metric)", Temperature Coefficient=X7R, Voltage Rating=16V, Dimensions="0.063\" L x 0.031\" W (1.60mm x 0.80mm)"
C27: library part CAP_10uF_0603, "CAP CER 10UF 10V X5R 0603", Digikey Part Number=311-1817-1-ND, Manufacturer=Yageo, MPN=CC0603MRX5R6BB106, Package="0603 (1608 Metric)", Voltage Rating=10V, Dimensions="0.063\" L x 0.031\" W (1.60mm x 0.80mm)"
CAN1 CAN2 M-A M-C M-E M-F M-P MOIST TEMP: library part CON_3M_PH_TOP_SMT, "CONN HEADER PH TOP 3POS 2MM SMD", Manufacturer=JST, Part Number=B3B-PH-SM4-TB, ComponentLink1Description=Datasheet, ComponentLink1URL=http://www.jst-mfg.com/product/pdf/eng/ePH.pdf
D1: "TVS DIODE 24V 41V SOT323-3", Digikey Part Number=1727-3891-1-ND, Manufacturer="Nexperia USA Inc.", MPN=PESD2CAN,215, Package="SC-70, SOT-323", ComponentLink1Description=Datasheet, ComponentLink1URL=https://assets.nexperia.com/documents/data-sheet/PESD1CAN-U.pdf
D2: "LED RED DIFFUSED 0805 SMD", Digikey Part Number=475-1278-1-ND, Forward Voltage Drop=2V, Manufacturer=OSRAM, MPN="LS R976-NR-1", Package="0805 (2012 Metric)"
D3: "LED YELLOW DIFFUSED 0805 SMD", Digikey Part Number=475-2560-1-ND, Forward Voltage Drop=2.2V, Manufacturer=OSRAM, MPN="LY R976-PS-36", Package="0805 (2012 Metric)"
D4 D5 D6: "LED GREEN DIFFUSED 0805 SMD", Digikey Part Number=475-1410-1-ND, Forward Voltage Drop=2.2V, Manufacturer=OSRAM, MPN="LG R971-KN-1", Package="0805 (2012 Metric)"
E-C E-E: library part CON_5M_PH_TOP_SMT, "CONN HEADER PH TOP 5POS 2MM SMD", Manufacturer=JST, Part Number=B5B-PH-SM4-TB, ComponentLink1Description=Datasheet, ComponentLink1URL=http://www.jst-mfg.com/product/pdf/eng/ePH.pdf
J1: Digikey Part Number=A97553-ND, Manufacturer="TE Connectivity", MPN=1-1337543-0
LS-C LS-E-B LS-ET RGB: library part CON_2M_PH_TOP_SMT, "CONN HEADER PH TOP 2POS 2MM SMD", Manufacturer=JST, Part Number=B2B-PH-SM4-TB, ComponentLink1Description=Datasheet, ComponentLink1URL=http://www.jst-mfg.com/product/pdf/eng/ePH.pdf
MH1 MH2 MH3 MH4: "6cm x 6cm"
P1: "Header, 4-Pin Dual row", Digikey Part Number=S9015E-04-ND, Manufacturer="Sullins Connector Solutions", MPN=GRPB042VWVN-RC
POWER: library part CON_2M_PH_TOP_TH, "CONN HEADER PH TOP 2POS 2MM", Manufacturer=JST, Part Number=B2B-PH-K-S, ComponentLink1Description=Datasheet, ComponentLink1URL=http://www.jst-mfg.com/product/pdf/eng/ePH.pdf
R1 R8 R32: "RES SMD 0 OHM JUMPER 1/10W 0603", Digikey Part Number=311-0.0GRCT-ND, Manufacturer=Yageo, MPN=RC0603JR-070RL, Package="0603 (1608 Metric)", Dimensions="0.063\" L x 0.031\" W (1.60mm x 0.80mm)"
R2: "RES SMD 120 OHM 5% 1/10W 0603", Digikey Part Number=311-120GRCT-ND, Manufacturer=Yageo, MPN=RC0603JR-07120RL, Package="0603 (1608 Metric)", Tolerance=5%, Dimensions="0.063\" L x 0.031\" W (1.60mm x 0.80mm)"
R3 R17 R18: "RES SMD 4.7K OHM 5% 1/10W 0603", Digikey Part Number=311-4.7KGRCT-ND, Manufacturer=Yageo, MPN=RC0603JR-074K7L, Package="0603 (1608 Metric)", Tolerance=5%, Dimensions="0.063\" L x 0.031\" W (1.60mm x 0.80mm)"
R4 R5 R6 R7 R19 R20 R21 R22 R23 R24 R25 R26 R29 R31: "RES SMD 10K OHM 5% 1/10W 0603", Digikey Part Number=311-10KGRCT-ND, Manufacturer=Yageo, MPN=RC0603JR-0710KL, Package="0603 (1608 Metric)", Tolerance=5%, Dimensions="0.063\" L x 0.031\" W (1.60mm x 0.80mm)"
R9: "RES SMD 4.7M OHM 1% 1/10W 0603", Digikey Part Number=311-4.70MHRCT-ND, Manufacturer=Yageo, MPN=RC0603FR-074M7L, Package="0603 (1608 Metric)", Tolerance=1%, Dimensions="0.063\" L x 0.031\" W (1.60mm x 0.80mm)"
R10 R11: "RES SMD 30K OHM 0.5% 1/10W 0603", Digikey Part Number=311-30KDCT-ND, Manufacturer=Yageo, MPN=RT0603DRD0730KL, Package="0603 (1608 Metric)", Tolerance=0.5%, Dimensions="0.063\" L x 0.031\" W (1.60mm x 0.80mm)"
R12: "RES SMD 75K OHM 0.5% 1/10W 0603", Digikey Part Number=311-75KDCT-ND, Manufacturer=Yageo, MPN=RT0603DRD0775KL, Package="0603 (1608 Metric)", Tolerance=0.5%, Dimensions="0.063\" L x 0.031\" W (1.60mm x 0.80mm)"
R13: "RES SMD 2.2K OHM 1% 1/10W 0603", Digikey Part Number=311-2.20KHRCT-ND, Manufacturer=Yageo, MPN=RC0603FR-072K2L, Package="0603 (1608 Metric)", Tolerance=1%, Dimensions="0.063\" L x 0.031\" W (1.60mm x 0.80mm)"
R14: "TRIMMER 5K OHM 0.5W PC PIN TOP", Digikey Part Number=3362P-502LF-ND, Manufacturer="Bourns Inc.", MPN=3362P-1-502LF, Tolerance=10%, Dimensions="0.275\" x 0.260\" Face x 0.185\" H (6.99mm x 6.60mm x 4.70mm)"
R15: "RES SMD 1K OHM 5% 1/10W 0603", Digikey Part Number=311-1.0KGRCT-ND, Manufacturer=Yageo, MPN=RC0603JR-071KL, Package="0603 (1608 Metric)", Tolerance=5%, Dimensions="0.063\" L x 0.031\" W (1.60mm x 0.80mm)"
R16 R27 R28 R30 R33: "RES SMD 100 OHM 1% 1/10W 0603", Digikey Part Number=311-100HRCT-ND, Manufacturer=Yageo, MPN=RC0603FR-07100RL, Package="0603 (1608 Metric)", Tolerance=1%, Dimensions="0.063\" L x 0.031\" W (1.60mm x 0.80mm)"
S1: "Power Switch (Red)", Digikey Part Number=CKN10587CT-ND, Manufacturer=C&K, MPN="PTS830GM140 SMTR LFS", ComponentLink1Description=Datasheet, ComponentLink1URL=https://www.ckswitches.com/media/1478/pts830.pdf
S2 S3: "Tactile Switch (Grey)", Digikey Part Number=SW1021TR-ND, Manufacturer="Omron Electronics Inc-EMC Div", MPN=B3U-1100P
U1: library part LTC2875, "IC TXRX CAN 4MBPS 8SO", Digikey Part Number=LTC2875IS8#PBF-ND, Manufacturer="Linear Technologies", MPN=LTC2875IS8#PBF, Package="8-SOIC (0.154\", 3.90mm Width)", ComponentLink1Description=Datasheet, ComponentLink1URL=https://www.analog.com/media/en/technical-documentation/data-sheets/2875f.pdf
U2: Digikey Part Number=497-15167-ND, Manufacturer=STMicroelectronics, Package=64-LQFP, ComponentLink1Description=Datasheet, ComponentLink1URL=https://www.st.com/content/ccc/resource/technical/document/datasheet/95/3c/2e/5b/21/09/45/a6/DM00115237.pdf/files/DM00115237.pdf/jcr:content/translations/en.DM00115237.pdf#%5B%7B%22num%22%3A96%2C%22gen%22%3A0%7D%2C%7B%22name%22%3A%22XYZ%22%7D%2C67%2C755%2Cnull%5D, MPN=STM32F091RC
U3: "4.5MHz, BiMOS Operational Amplifier with MOSFET Input/Bipolar Output", Digikey Part Number=CA3140AMZ-ND, Manufacturer="Renesas Electronics America Inc.", MPN=CA3140AMZ
U4: "IC OPAMP JFET 3MHZ 8SOIC", Digikey Part Number=296-34259-5-ND, Manufacturer="Texas Instruments", MPN=TL081BCD
U5: "LM2776 Switched Capacitor Inverter", Digikey Part Number=296-43957-1-ND, Manufacturer="Texas Instruments", MPN=LM2776DBVR
ULTRA: library part CON_4M_PH_TOP_SMT, "CONN HEADER PH TOP 4POS 2MM SMD", Manufacturer=JST, Part Number=B4B-PH-SM4-TB, ComponentLink1Description=Datasheet, ComponentLink1URL=http://www.jst-mfg.com/product/pdf/eng/ePH.pdf
VR1: "IC REG LINEAR 3.3V 1A DPAK", Current Output=1A, Digikey Part Number=NCP1117DT33T5GOSCT-ND, Manufacturer="ON Semiconductor", MPN=NCP1117DT33T5G
Y1: "CRYSTAL 32MHZ 8PF SMD", Digikey Part Number=1253-1730-1-ND, Manufacturer="Kyocera International Inc. Electronic Components", MPN=CX2520DB32000D0GPSC1, Package="4-SMD, No Lead", Dimensions="0.098\" L x 0.079\" W (2.50mm x 2.00mm)"

## Via types
v1: diameter 28, hole 16, Top Layer to GND, 83 vias
v2: diameter 50, hole 28, Top Layer to GND, 7 vias

## Nets (pads, with @x,y where several pads share a name; then routed paths per layer and width w, separated by ;. In a path a pad name is that pad's centre, name@x,y a point inside that pad or via, vN(x,y) a via of type N, cw(c..) or ccw(c..) an arc to the next point about the centre after c; other vN are vias at no path point)
+3V3: 3V3.1 C1.2 C5.1 C6.1 C7.1 C8.2 C9.1 C10.2 C11.2 C12.2 C27.2 P1.1 R3.2 R16.2 R17.2 R18.2 R24.2 R25.2 R26.2 R29.2 R31.1 TEMP.3 U1.3 U2.1 U2.13 U2.19 U2.32 U2.48 U2.64 VR1.2 | length 14229.3
  Top Layer w10: v1(1880,1785) 1885,1790 1899.82,1775.18 U2.19 ; v1@1890,1461.91 1890,1480.69 1928.58,1519.28 U2.32 ; U2.13 2086.42,1808.58 v1(2090,1805) ; U2.48 v1(2393.15,1448.41) ; U2.64 2393.5,1868.5 v1(2405,1880)
  Top Layer w15: 75,1590 75,2885 280,3090 3750,3090 3870,2970 3870,1670 3881.75,1658.25 3905,1635 3905,1610 ; 3V3.1 320,1030 325,1035 ; 540,1075 543.66,1071.34 633.66,1071.34 C27.2@635,1070 ; C27.2 715,990 715,955 R16.2@755,915 ; 1870.13,3080 1873.5,2290 ; v1(1880,1785) 1873.5,1791.5 1873.5,2020 ; R31.1@1955,2020 1873.5,2020 ; R29.2 1873.5,2290 ; U2.1 2394.58,1885.42 v1@2400,1880 ; v1@2595,1920 R18.2 R17.2 2706.5,1866.5 R17.2@2710,1870 ; v1(2595,1925) 2665,1995 2720,1995 2752.78,2027.78 2752.78,2037.81 2760.1,2045.13 2770.14,2045.13 2930,2205 2930,2255 2920,2265 U1.3@2845,2265 ; R24.2@3145,555 3145,510 3215,440 3530,440 3615,525 R25.2@3615,555 ; R26.2 3502.01,1620 TEMP.3@3525,1620 ; R25.2@3615,565 R25.2@3615,555 ; TEMP.3@3620,1617.48 3627.48,1610 3905,1610 ; 1873.5,2020 1873.5,2290 ; R25.2@3615,555 3770,555 3905,690 3905,1610
  GND w10: C5.1 C6.1@1959.8,1564.8 ; C6.1 1959.8,1694.8 1980,1715 C7.1@1980,1770 ; C10.2@1979.18,1840.82 2038.36,1900 C8.2@2095,1900 ; v1(2090,1805) 2099.82,1814.82 C8.2 2130.5,1925 2210,1925 2255,1880 C11.2@2260,1880 ; C11.2 C9.1 C9.1@2331.5,1881.5 ; C9.1@2335,1885 C9.1@2331.5,1881.5 ; v1@2400,1880 2398.5,1881.5 C9.1@2331.5,1881.5 ; P1.1@2543.5,1490.75 P1.1
  GND w15: v1(1880,1785) v1@1884.55,1785 ; v1@1890,1461.91 1919.8,1461.91 1944.8,1486.91 1949.8,1481.91 C5.1 ; C5.1@1965,1480 1965,1425 1995,1395 2286.59,1395 C12.2 v1(2393.15,1448.41) 2441.56,1400 C1.2@2540,1400 ; C7.1@1965,1770 1950,1785 v1@1884.55,1785 ; C10.2@1975,1845 1944.55,1845 v1@1884.55,1785 ; v1(2405,1880) 2445,1920 v1@2595,1920 ; C1.2 P1.1@2543.5,1490.75
  other v1: 90,1080 180,1080 270,1080 360,1080 450,1080 135,1170 225,1170 315,1170 405,1170 495,1170 90,1260 180,1260 135,1350 225,1350 90,1440 180,1440 1895,1460 135,1530 225,1530 315,1530 405,1530 495,1530
+5V: C13.2 C14.1 C15.2 C16.1 C25.2 C26.2 E-C.4 E-E.4 M-F.2 M-P.2 POWER.1 R4.2 R5.2 R6.2 R7.2 U3.7 U4.7 U5.3 U5.4 ULTRA.1 VR1.3 | length 6950.5
  Top Layer w10: VR1.3 718,1431.87 781.46,1368.41 C26.2
  Top Layer w15: U5.4@245.16,1963.65 245.16,2077.82 C25.2 142.56,2180.42 142.56,2331.91 202.56,2391.91 655.13,2391.91 689.44,2426.23 783.25,2426.23 862.56,2346.91 U3.7 1121.07,2346.91 1147.56,2373.41 C13.2 1411.07,2373.41 1517.56,2266.91 C16.1@1517.56,1919.91 ; U5.4 205,1920.18 205,1870 380,1695 600,1695 675,1620 675,1430 VR1.3@680,1425 ; C26.2 883.08,1368.41 912.86,1338.63 912.86,1130.37 956.32,1086.91 1070,1086.91 E-C.4 1460.79,1081.91 E-E.4 ; U4.7@1317.05,1916.91 1320.04,1919.91 C16.1@1517.56,1919.91 ; C15.2 1666.07,1919.91 C16.1 C16.1@1517.56,1919.91 ; v1@1730,1250 1731.26,1248.74 ULTRA.1 ; v1@2269.54,1104.27 M-P.2@2409.69,1104.27 ; M-P.2 2412.92,1090 2745,1090 M-F.2@2760,1075
  GND w15: v1(908.74,1226.95) R6.2 R4.2 1113.5,1366.91 1456.91,1366.91 ; R7.2 R5.2 1455.35,1365.35 1456.91,1366.91 ; v1(1725,1250) 2110,1250 2250,1110 ; v1@1725,1255 1725,1350 1670,1405 1535,1405 1496.91,1366.91 1456.91,1366.91
  other v1: 2265,1105
-5V: -5V.1 C18.2 C19.2 C21.2 C22.2 C23.1 R12.1 U3.4 U4.4 U5.1 | length 1563.1
  Top Layer w15: -5V.1@500,2135 499.58,2135.42 C23.1 377.56,2129.51 319.97,2071.91 319.97,2039.51 357.56,2001.91 C19.2 ; U3.4@733.08,2246.91 733.08,2173.92 726.07,2166.91 687.56,2166.91 612.56,2091.91 C19.2 ; C21.2@972.56,1824.91 796.07,1824.91 787.56,1833.41 781.46,1827.31 612.56,1827.31 C19.2 ; C21.2@980.06,1832.41 995.56,1816.91 U4.4@1128.08,1816.91
CAN_H: CAN1.1 CAN2.1 CANH1.1 D1.1 R2.1 U1.7 | length 1369.5
  Top Layer w10: CANH1.1@2990,2895 CANH1.1@2992.5,2897.5 ; R2.1 3065,2825 CANH1.1@2992.5,2897.5 ; U1.7@3080,2310 3265,2310 3307.4,2352.4 D1.1 ; CAN1.1@3305,2950 3045,2950 CANH1.1@2992.5,2897.5 ; CAN2.1@3306.26,2622.01 3306.26,2363.74 D1.1@3320,2350 ; CAN2.1 CAN1.1
CAN_L: 1.1 CAN1.2 CAN2.2 CANL1.1 D1.2 U1.6 | length 2097.5
  Top Layer w10: 1.1 2890,2690 2890,2895 3060,3065 3370,3065 3390,3045 CAN1.2@3390,3035 ; U1.6@3070.96,2260 3065.96,2265 3290,2265 D1.2@3300,2275 ; D1.2 3327.6,2277.6 3385,2335 CAN2.2@3385,2540 ; CAN2.2@3385,2575 3390,2580 CAN2.2 3390,2730 ; CAN1.2 3390,2730 ; CANL1.1 3625,2730 3390,2730
GND: C1.1 C2.1 C3.1 C4.1 C5.2 C6.2 C7.2 C8.1 C9.2 C10.1 C11.1 C12.1 C13.1 C14.2 C15.1 C16.2 C17.1 C18.1 C19.1 C21.1 C22.1 C23.2 C25.1 C26.1 C27.1 CAN1.3 CAN2.3 D1.3 D2.2 D3.2 D4.2 D5.2 D6.2 E-C.5 E-E.5 GND.1 J1.2 LS-C.2 LS-E-B.2 LS-ET.2 M-A.3 M-C.3 M-E.3 M-F.1 M-P.1 MOIST.3 P1.5 POWER.2 R1.2 R15.1 R19.1 R20.1 R21.1 R22.1 R23.1 R32.1 R32.2 S1.1 S2.2 S3.2 TEMP.1 U1.2 U2.12 U2.18 U2.31 U2.47 U2.63 U4.3 U5.2 ULTRA.4 VR1.1 Y1.2 | length 5512.7
  Top Layer w10: v1(520.57,853.85) D2.2 ; VR1.1 807.96,1251.95 v1(810,1249.91) ; C19.1 928.05,2001.91 v2(980.06,1949.9) 1009.57,1949.9 1092.56,1866.91 U4.3@1128.08,1866.91 ; GND.1@795,1170 810,1185 v1(810,1249.91) ; C27.1 830,1000.98 v1(830,925) ; C26.1 815,1254.91 v1(810,1249.91) ; v1(897.81,494.69) M-E.3 ; E-C.5 1213.17,1003.17 v1@1215,1005 ; C14.2@1147.56,2247.43 1157.49,2237.49 1200,2280 v2(1250,2280) 1297.15,2280 C13.1 ; v1@1330,1000 1334.4,1004.4 E-E.5 ; v1(1375,480) 1375.08,480.08 M-A.3 ; C16.2@1517.56,1793.92 1539.57,1771.91 v2(1667.56,1771.91) C15.1 ; v1@1725,1015 1727.48,1012.52 ULTRA.4 ; MOIST.3@1760,2165 1765,2160 v1(1765,2105) ; v1@1870,470 1873.92,473.92 M-C.3 ; v1(1890,1521.91) 1905.76,1521.91 1921.13,1537.28 1954.81,1537.28 U2.31 ; v1@1905,1845 1905,1810 1920.13,1794.87 U2.18 ; S3.2 1955,2145 v1@1960,2150 ; S2.2 v1@1965,2415 ; U2.12 2106.1,1838.9 v1@2135,1810 ; v1(2155,2780) 2157.05,2777.95 D6.2 ; v1@2230,2780 2234.03,2775.97 D5.2 ; v1(2250,2010) 2285,2010 2295,2000 Y1.2@2300,2005 ; v1(2275,1515) 2278.7,1515 2302.95,1490.75 U2.47 ; v1@2277.01,1182.23 2277.79,1183.01 M-P.1@2409.69,1183.01 ; v1@2300,1735 2359.87,1794.87 U2.63 ; v1@2305,2780 v1(2310,2775) 2311.02,2773.98 D4.2 ; Y1.2@2309.98,2006.91 Y1.2@2311.81,2008.75 ; C2.1 v1(2434.7,2135.42) ; D3.2 2388.01,2773.01 v1(2390,2775) ; C3.1 2434.7,2071.85 v1(2434.7,2135.42) ; C4.1 v1(2434.7,2135.42) ; S1.1 2562.83,2416.75 v1@2563,2416.91 ; v1(2620,1165) 2621.97,1166.97 M-F.1 ; v1(2730,710) 2810,710 LS-C.2@2815,705 ; v1(2765,2275) 2780,2275 U1.2@2825,2320 ; v1(3030,1530) 3160,1530 LS-E-B.2@3165,1535 ; LS-ET.2@3332.99,704.37 3479.37,704.37 v1@3478.74,705 ; D1.3 v1(3500,2315) ; CAN2.3 3468.74,2663.74 3470,2665 v1(3535,2665) ; CAN1.3 3468.74,3003.74 3470,3005 v1(3545,3005) ; TEMP.1@3584.75,1456.71 3721.68,1456.71 3721.76,1456.8
  Top Layer w15: C25.1 276.97,2198.41 v2(282.56,2192.82) ; U5.2@287.56,2076.91 282.56,2071.91 v2(282.56,2192.82) ; C23.2 371.97,2192.82 v2(282.56,2192.82) ; C18.1@612.56,1764.32 786.46,1764.32 C22.1 869.73,1765.42 v2(875,1760.14) 933.23,1701.91 C21.1@969.57,1701.91 ; C21.1@974.57,1711.91 C21.1@977.56,1708.92
  GND w10: R32.2 1778.03,1681.97 R32.1@1780,1680
  other v1: 1860,470 3475,705 1215,1000 1325,1005 1720,1015 2265,1180 3736.76,1456.8 2305,1735 2145,1805 1905,1850 1960,2145 1965,2410 2562.36,2421.91 2235,2780
Net1_2: 1.2 R2.2 | length 227.6
  Top Layer w10: 1.2@2925,2545 2950,2545 3065,2660 R2.2
NetC2_2: C2.2 R8.2 Y1.1 | length 158
  Top Layer w10: R8.2@2205,2131.91 2208.5,2135.42 C2.2 2293.5,2072.27 Y1.1
NetC3_2: C3.2 U2.5 Y1.3 | length 290.3
  Top Layer w10: U2.5@2244.21,1885.42 2244.21,1938.06 2256.06,1949.9 2331.4,1949.9 2349.21,1967.72 Y1.3@2349.21,2008.45 ; Y1.3@2362.99,2001.36 2362.99,2008.75 2429.73,2008.75 C3.2@2433.66,2012.68
NetC17_2: C17.2 R9.2 U3.3 | length 272.2
  Top Layer w10: v2@642.56,2256.91 682.56,2296.91 U3.3@733.08,2296.91
  GND w10: R9.2@564.06,2366.91 C17.2 592.56,2286.91 v2(632.56,2246.91)
NetC20_1: C20.1 R14.3 U3.2 | length 625.3
  Top Layer w15: v2@647.56,2346.91 U3.2@733.08,2346.91
  GND w10: v2@642.56,2336.91 C20.1 791.07,2674.47 R14.3 ; R14.3@752.56,2711.91 R14.3@759.47,2705.01
  other v2: 642.56,2346.91
NetC20_2: C20.2 R11.1 R13.2 U3.6 | length 507.8
  Top Layer w10: U3.6 992.56,2296.91 1027.56,2261.91 v1(1027.56,2216.91)
  GND w10: R11.1@850,2265 854.06,2269.06 C20.2 ; R11.1 895.16,2298.02 R13.2 v1(1027.56,2216.91)
NetC24_1: C24.1 U5.5 | length 88.6
  Top Layer w10: C24.1 266.07,1910.42 282.56,1926.91 U5.5@282.56,1963.65
NetC24_2: C24.2 U5.6 | length 85.5
  Top Layer w10: U5.6@319.97,1963.65 319.97,1918.02 329.06,1908.92 C24.2
NetD2_1: D2.1 R16.1 | length 83.9
  Top Layer w10: D2.1 751.11,853.85 R16.1
NetD3_1: D3.1 R27.2 | length 175.2
  Top Layer w10: R27.2 2388.01,2506.06 D3.1
NetD4_1: D4.1 R28.2 | length 173.7
  Top Layer w10: R28.2 2311.02,2502.41 D4.1
NetD5_1: D5.1 R30.2 | length 173
  Top Layer w10: R30.2 2235,2499.72 2235,2606.01 D5.1
NetD6_1: D6.1 R33.2 | length 170.7
  Top Layer w10: R33.2 2157.05,2495.1 D6.1
NetE-C_1: E-C.1 EC1.1 R4.1 U2.23 | length 1362.2
  Top Layer w10: E-C.1@1065,1323.13 1065,1560 1145,1640 EC1.1@1155,1640 ; E-C.1@1140,1318.13 v1@1224.92,1318.13 ; EC1.1 1217.5,1697.5 1380,1697.5 ; 1375,1696.44 U2.23
  GND w10: R4.1 1223.7,1316.91 v1(1225,1318.21)
NetE-C_2: E-C.2 EC2.1 R6.1 U2.24 | length 1336.1
  Top Layer w10: E-C.2 1223.27,1239.39 1258.45,1274.57 1258.45,1557.45 1379,1678 1955.25,1678 U2.24
  GND w10: R6.1 1212.01,1226.95 v1(1226.97,1241.91)
NetE-C_3: E-C.3 ECI.1 U2.25 | length 1992.5
  Top Layer w10: E-C.3 1229.09,1160.65 1285,1216.56 1285,1430.11 1511.96,1657.07 1835.09,1657.07 1838.02,1660 1921.98,1660 1924.91,1657.07 U2.25
  GND w10: ECI.1 v1@1220,1155
  other v1: 1225,1160
NetE-E_1: E-E.1 EE1.1 R5.1 U2.26 | length 1071.9
  Top Layer w10: EE1.1@1545,1550 1462.01,1467.01 E-E.1 1608.86,1319.36 v1(1610,1318.21) 1610,1515 1731.91,1636.91 U2.26@1927.84,1636.91
  GND w10: R5.1 1605.98,1322.23 v1(1610,1318.21)
NetE-E_2: E-E.2 EE2.1 R7.1 U2.27 | length 2119.6
  Top Layer w10: E-E.2 1607.13,1240.62 v1(1608.43,1241.91) 1641.73,1275.21 1641.73,1428.18 1831.24,1617.7 U2.27
  GND w10: EE2.1@1110,160 1110,745 v1@1605,1240 ; R7.1 1528.35,1241.91 v1(1608.43,1241.91)
NetE-E_3: E-E.3 EEI.1 U2.28 | length 1952.2
  Top Layer w10: E-E.3 1624.96,1161.88 1665,1201.91 1665,1426 1837.01,1598.02 U2.28
  GND w10: EEI.1@1265,160 1265,825 v1@1605,1165
  other v1: 1610,1160
NetJ1_1: J1.1 R9.1 | length 1118.4
  GND w10: R9.1@501.07,2366.91 501.07,2622.98 635,2756.91 989.92,2756.91 1134.92,2611.91 1238.09,2611.91 J1.1@1245,2605
NetLS-C_1: LS-C.1 R24.1 U2.41 | length 1692.6
  Top Layer w10: U2.41 2186.53,1446.72 2186.53,1138.47 2266,1059 2507.28,1059 2540,1026.28 2540,670 2585,625 LS-C.1 3140,625 R24.1@3145,630
NetLS-E-B_1: LS-E-B.1 R26.1 U2.45 | length 1279.5
  Top Layer w10: U2.45 2263.58,1361.42 2288,1337 2957,1337 3080,1460 R26.1@3395,1460
NetLS-ET_1: LS-ET.1 R25.1 U2.44 | length 1799.7
  Top Layer w10: U2.44 2243.9,1355.65 2280.54,1319 2770,1319 2935,1154 2935,935 LS-ET.1@3235,635 ; LS-ET.1 3615,625 R25.1@3620,620
NetM-A_1: M-A.1 PWMA.1 R23.2 U2.36 | length 2030.6
  Top Layer w10: PWMA.1@1435,155 1341,249 1341,606 1365,630 v1(1375,630) 1382.56,637.56 M-A.1 1517.82,757.82 1595,835 1810,835 1811.91,836.91 1991,836.91 2086.42,932.33 U2.36
  GND w10: v1@1381.5,631.5 R23.2
NetM-A_2: M-A.2 U2.37 | length 1473.6
  Top Layer w10: v1@1375,555 1378.82,558.82 M-A.2 1693.82,558.82 1795,660 1795,773.91 1840,818.91 1998.46,818.91 2106.1,926.56 U2.37
  other v1: 1370,555
NetM-C_1: M-C.1 PWMC.1 R21.2 U2.38 | length 1678.4
  Top Layer w10: PWMC.1@1845,155 1765,235 1765,535 v1(1860,630) 1861.4,631.4 M-C.1 2012.82,807.82 2125.79,920.79 U2.38
  GND w10: v1@1865,630 1908.87,586.13 R21.2
NetM-C_2: M-C.2 U2.39 | length 1016.5
  Top Layer w10: M-C.2 2102.66,552.66 2145,595 2145,915 ; 2145.47,901.62 U2.39
NetM-E_1: M-E.1 PWME.1 R19.2 U2.34 | length 2438.9
  Top Layer w10: PWME.1@660,160 660,423.09 v1(891.91,655) 894.75,652.17 M-E.1 ; M-E.1@1080,660 1080,771.91 1278.09,970 2005,970 2047.05,1012.05 U2.34
  GND w10: v1(891.91,655) 958.41,655 R19.2
NetM-E_2: M-E.2 U2.35 | length 1682.8
  Top Layer w10: M-E.2 1138.43,573.43 1425,860 1988.63,860 2066.73,938.1 U2.35
NetM-F_3: M-F.3 PWMF.1 R22.2 U2.42 | length 1802.5
  Top Layer w10: U2.42 2205,1447.94 2205,1198.99 2268.99,1135 2510,1135 2520,1125 2875,1125 2895,1105 2895,1040 2854.49,999.49 M-F.3@2763.58,999.49 ; PWMF.1 2585,750 2585,985 v1@2615,1015 ; v1(2625,1010) 2625.51,1009.49 M-F.3
  GND w10: v1@2630,1005 2635,1010 R22.2
NetM-P_3: M-P.3 PWMP.1 R20.2 U2.40 | length 1200.9
  Top Layer w10: U2.40 2165.16,1129.75 2264.9,1030 v1(2265,1030) 2405.22,1030 M-P.3@2409.69,1025.53 ; PWMP.1 M-P.3@2460,1015
  GND w10: v1(2265,1030) 2336.35,1030 2340.81,1025.53 R20.2@2349.21,1033.94
NetMOIST_1: MOIST-P.1 MOIST.1 U2.20 | length 1068.9
  Top Layer w10: MOIST-P.1@1725,2565 1697.01,2537.01 MOIST.1 1697.25,2329.51 1830,2329.51 1840,2319.51 1840,1765.14 1849.65,1755.5 U2.20
NetMOIST_2: MOIST-D.1 MOIST.2 U2.21 | length 1401
  Top Layer w10: MOIST.2@1605,2255 1500,2360 1500,2555 MOIST-D.1@1745,2800 ; MOIST.2 1785.9,2251.01 1820,2216.91 1820,1756.86 1841.36,1735.5 U2.21@1925,1735.5
NetP1_2: P1.2 U2.51 UART_U.1 | length 818.3
  Top Layer w10: U2.51 2466.35,1558.65 2489.28,1535.72 2599.41,1535.72 P1.2
  GND w10: P1.2 2643.94,1476.06 UART_U.1@3015,1105
NetP1_3: P1.3 U2.52 UART_R.1 | length 819.8
  Top Layer w10: U2.52 2468.11,1578.33 2525.5,1635.72 2562.38,1635.72 2588.47,1609.63 2588.47,1575.94 2628.7,1535.72 2662.38,1535.72 2706.91,1491.19 P1.3
  GND w10: P1.3 2985.13,1250 UART_R.1@3010,1250
NetP1_4: P1.4 U2.54 UART_RTS.1 | length 1153.3
  Top Layer w10: U2.54 2482.03,1617.7 2518.04,1653.72 2744.38,1653.72 2799.41,1598.69 2799.41,1541.04 P1.4@2840,1500.46 ; P1.4@2840,1485 P1.4@2840,1500.46 ; P1.4 2843.94,1496.52 P1.4@2840,1500.46 ; UART_RTS.1@3265,1840 3175,1840 2840,1505 P1.4@2840,1500.46
NetP1_6: P1.6 U2.46 | length 575.6
  Top Layer w10: U2.46 2283.27,1396.73 v1@2305,1375
  GND w10: v1(2315,1370) 2320.31,1375.31 2565.36,1375.31 2571.22,1381.17 2571.22,1438.2 2588.47,1455.45 2588.47,1533.47 P1.6@2640,1585
NetP1_7: P1.7 U2.49 | length 578.7
  Top Layer w10: U2.49 2394.23,1520 2425,1520 2498.34,1446.66 2762.38,1446.66 2795,1479.28 2795,1520 2743.94,1571.06 P1.7
NetPH_1: PH.1 R10.2 U2.22 U4.6 | length 1310.2
  Top Layer w10: PH.1@1310,2110 1256.5,2056.5 R10.2 1282.91,1715.5 1395,1715.5 ; U4.6 1363.09,1866.91 1395,1835 1395,1715.5 ; 1395,1715 1395,1715.5 ; U2.22 1955.87,1715.5 1395,1715.5
NetR1_1: R1.1 U1.8 | length 135.4
  Top Layer w10: v1@3065,2440 3065.96,2439.04 U1.8@3065.96,2365
  GND w10: v1(3065,2435) R1.1
NetR3_1: R3.1 TEMP.2 TEMPT.1 U2.50 | length 1990.8
  Top Layer w10: U2.50 2337.72,1538.96 2325,1526.24 2325,1508.4 2352.71,1480.69 2438.85,1480.69 2544.54,1375 2810,1375 2930,1495 3455,1495 3457.5,1492.5 ; TEMPT.1@3460,1155 3460,1490 3457.5,1492.5 ; TEMP.2 3505,1540 3457.5,1492.5 ; TEMP.2@3670,1550 R3.1
NetR8_1: R8.1 U2.6 | length 157.8
  Top Layer w10: R8.1@2205,2068.92 2205,2003.99 2224.21,1984.78 2224.21,1922.9 U2.6@2224.21,1919.12
NetR10_1: R10.1 R11.2 R12.2 U4.2 | length 829.6
  Top Layer w10: R12.2@789.06,2166.91 852.56,2166.91 1102.56,1916.91 U4.2 1170,1916.91 1202.01,1884.91 R10.1@1202.01,1731.91
  GND w10: R11.2 791.07,2188.93 815,2165 v1(860,2165)
NetR13_1: R13.1 R14.1 | length 379
  GND w10: R14.1@952.56,2711.91 1027.56,2636.91 1027.56,2367.44 R13.1@1030,2365
NetR14_2: R14.2 R15.2 | length 88.5
  GND w10: R15.2 R14.2@851.07,2610.42
NetR17_1: R17.1 RGB.1 SCL.1 U2.58 | length 1123.7
  Top Layer w10: U2.58 2591.44,1696.44 R17.1@2690,1795 ; R17.1@2720,1795 2770,1745 2920,1745 2970,1795 RGB.1
  GND w10: v1(2920,1750) 2960,1750 3165,1955 SCL.1@3240,1955
NetR18_1: R18.1 RGB.2 SDA.1 U2.59 | length 851.9
  Top Layer w10: U2.59 2506.13,1716.13 R18.1@2580,1790 ; R18.1@2580,1815 2550,1845 2550,1975 2645,2070 SDA.1 ; R18.1 2626.5,1835 RGB.2@2890,1835
NetR27_1: R27.1 U2.8 | length 566.4
  Top Layer w10: U2.8@2184,1915 2184,1963.86 2150,1997.86 2150,2205.06 R27.1
NetR28_1: R28.1 U2.9 | length 569.8
  Top Layer w10: U2.9@2165,1890 2163,1892 2163,1958.37 2130,1991.37 2130,2258.4 R28.1
NetR29_1: R29.1 S2.1 U2.14 | length 637.6
  Top Layer w10: S2.1@1975,2485 2065,2395 2065,1892.92 2065.05,1892.87 2065.05,1887.1 U2.14
NetR30_1: R30.1 U2.10 | length 552.7
  Top Layer w10: U2.10@2145,1885 2145,1950.91 2110,1985.91 2110,2311.73 R30.1
NetR31_2: R31.2 S3.1 U2.15 | length 385
  Top Layer w10: S3.1 1973.07,2221.93 2015,2180 2015,2021.5 R31.2 ; R31.2@2015,2015 2010,2010 2010,1964.12 2043.27,1930.85 2043.27,1889.2 U2.15
NetR33_1: R33.1 U2.11 | length 540.6
  Top Layer w10: R33.1 2090,2365.06 2090,1980.46 2104.42,1966.04 2104.42,1965.58 2124.1,1945.9 2124.1,1875.9 U2.11@2125,1875
NetU1_1: U1.1 U2.62 | length 831.3
  Top Layer w10: U2.62 2395.19,1773.5 2445,1773.5 2500,1828.5 2500,2060 2805,2365 U1.1@2843.52,2365
NetU1_4: U1.4 U2.61 | length 766.6
  Top Layer w10: U2.61 2470.5,1755.5 2525,1810 2525,2045.1 2699.9,2220 U1.4@2830,2220
NetU2_29: U2.29 ULTRA.2 UT.1 | length 1685.7
  Top Layer w10: v1@1695,1175 1695,1430.55 1842.79,1578.33 U2.29 ; v1(1700,1175) ULTRA.2@1765,1175
  GND w10: UT.1@1675,150 1675,1150 v1(1700,1175) v1@1705,1180
NetU2_30: U2.30 UE.1 ULTRA.3 | length 1615.7
  Top Layer w10: ULTRA.3@1863.74,1090 ULTRA.3 2003.74,1091.26 v1(2005,1090) 2005,1542.48 1988.83,1558.65 U2.30
  GND w10: v1(2005,1090) 2055,1040 UE.1
R\S\T\: C4.2 P1.8 S1.4 U2.7 | length 2092.8
  Top Layer w10: U2.7 2204.53,1917.13 2205,1917.6 2205,1978.53 2170,2013.53 2170,2150 2225,2205 C4.2@2498.41,2205 ; S1.4 2497.87,2205.54 C4.2@2498.41,2205 ; S1.4@2500,2250 2637.8,2387.8 2907.2,2387.8 2960,2335 2960,2215 3020,2155 3020,1725 2886.19,1591.19 P1.8 ; C4.2 C4.2@2498.41,2205
  GND w10: P1.8@2841.19,1591.19 P1.8
pads on no net: CAN1.4 CAN1.5 CAN2.4 CAN2.5 E-C.6 E-C.7 E-E.6 E-E.7 J1.MH1 J1.MH2 LS-C.3 LS-C.4 LS-E-B.3 LS-E-B.4 LS-ET.3 LS-ET.4 M-A.4 M-A.5 M-C.4 M-C.5 M-E.4 M-E.5 M-F.4 M-F.5 M-P.4 M-P.5 MH1.0 MH2.0 MH3.0 MH4.0 MOIST.4 MOIST.5 RGB.3 RGB.4 S1.2 S1.3 TEMP.4 TEMP.5 U1.5 U2.2 U2.3 U2.4 U2.16 U2.17 U2.33 U2.43 U2.53 U2.55 U2.56 U2.57 U2.60 U3.1 U3.5 U3.8 U4.1 U4.5 U4.8 ULTRA.5 ULTRA.6 Y1.4

## Polygon pours and split planes (outlines as drawn)
+3V3 on GND "GND-+3V3" (solid, pour order 22): 5,1645 10,1640 10,1010 575,1010 575,1645
GND on GND "GND-No Net" (solid, pour order 24): 0.73,1011.91 0.73,0 3965,0 3965,3149.61 1865,3149.61 1865,1772.19 1960.73,1772.19 1968.23,1764.69 1968.23,1706.19 1960.73,1698.69 1117.55,1698.69 1058.86,1640 575.9,1640 575.9,1011.91
no net on GND "GND-No Net 1" (solid, pour order 25): 30,1610
GND on GND "GND" (solid, pour order 23): 0.27,1660 1055.56,1660 1103.37,1707.81 1952.77,1707.81 1952.77,1763.98 1851.88,1763.98 1849.54,1766.32 1849.54,3149.61 0.27,3149.61
+3V3 on Top Layer "3V3 top" (solid, pour order 20): 575.9,1641.91 575.9,1011.91 0.9,1011.91 0.9,1641.91

## Keep-outs
Keep-Out Layer:
  the board outline again, w47.24

## Other copper
Top Layer:
  pour cut-out: 1642.6,1591.44
GND:
  pour cut-out: 407.5,1595.69
  pour cut-out: 217.48,1620.17

## Silkscreen, mask and mechanical layers (free items; w line width, h text height)
Top Overlay:
  text "Science Board  / Rev. 1 / Adrianna Ascalon" at 3010,100 h40

## Text inside footprints (layer, text, board x,y; h text height)
P1: Top Overlay "TX" at 2654.18,1367.09 h30 r90; Top Overlay "RX" at 2756.54,1367.09 h30 r90; Top Overlay "RTS" at 2862.84,1338.47 h30 r90; Top Overlay "IO" at 2654.18,1666.23 h30 r90; Top Overlay "CLK" at 2756.54,1662.29 h30 r90; Top Overlay "RST" at 2855.75,1666.23 h30 r90; Top Overlay "VCC" at 2551.82,1335.52 h30 r90; Top Overlay "GND" at 2555.75,1666.23 h30 r90